# EAGLE board LogicEngineAVR (EAGLE 6.5.0)
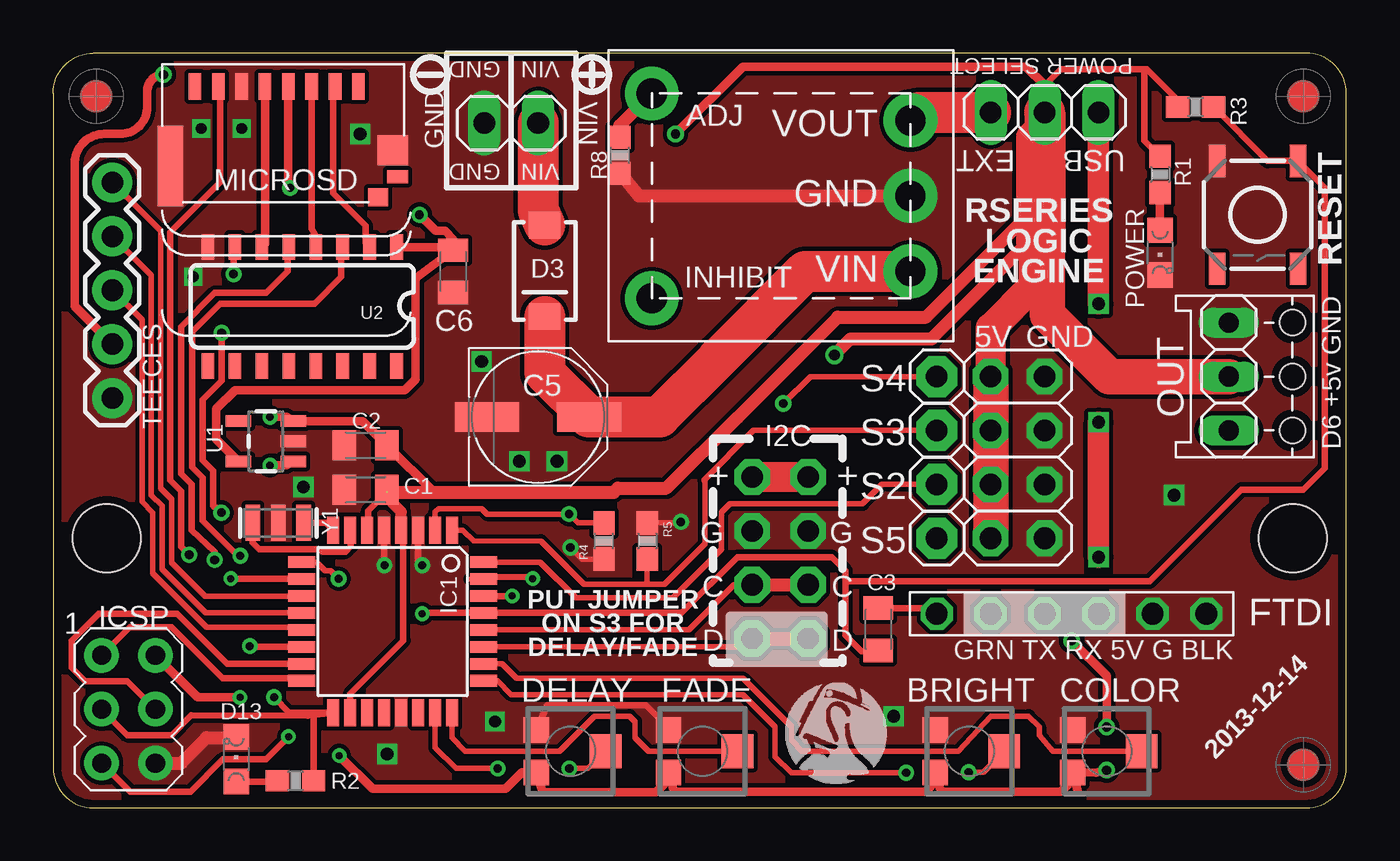
[diagram p0: board, top side]
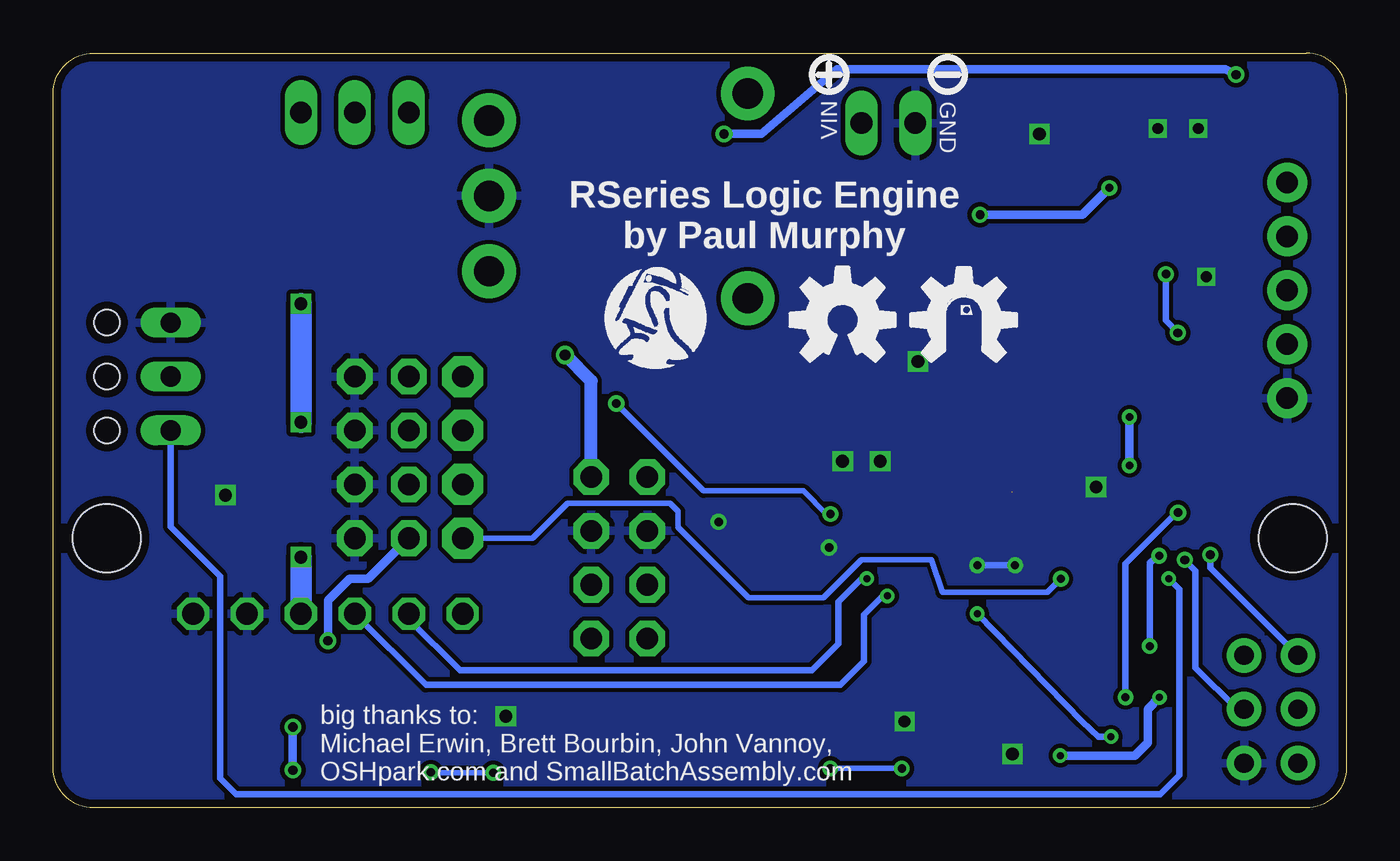
[diagram p1: board, bottom side, seen from below]

Size 60.96 x 35.56 mm. Coordinates in mm from the lower left corner, seen from the top.
Outline: 0,33.66 0,1.91 arc90 1.91,0 59.05,0 arc90 60.96,1.91 60.96,33.66 arc90 59.05,35.56 1.91,35.56 arc90 0,33.66
Copper layers (1*16): Top 0.0356mm / dielectric 1.5011mm / Bottom 0.0356mm
Design rules "LaenPCBOrder *": minimum track width 10mil, minimum drill 13mil, track to track 6mil, track to pad 6mil, pad to pad 6mil, via to via 12mil, smd to smd 6mil, copper to edge 15mil, drill to drill 6mil, minimum pad ring 7mil, minimum via ring 7mil, stop-mask expansion 4mil, vias tented up to drill 24mil, thermal gap 10mil
Net classes: 1 supply: width 0.305 mm, drill 0.152 mm, clearance 0.203 mm
Holes 3.2 mm at 58.42,12.7 2.54,12.7

## Footprints (pad centres in the part's own frame; a part is rotated, then mirrored left to right if it is on the bottom)
EVM3V = smd 1.2 x 1.2: 1 -1,-1.6; 3 1,-1.6 | smd 1.6 x 1.5: 2 0,1.65
C0805K = smd 1.1 x 1.4: 1 -1,0; 2 1,0
PANASONIC_D = smd 3 x 1.4: + 2.4,0; - -2.4,0
SMA-DIODE = smd 1.27 x 1.47: A -2.15,0; C 2.15,0
CHIPLED_0805 = smd 1.2 x 1.2: A 0,-1.05; C 0,1.05
1X02 = drill 1.016 long: 1 -1.27,0; 2 1.27,0
1X06-CLEAN = drill 1.016 octagon: 1 -6.35,0; 2 -3.81,0; 3 -1.27,0; 4 1.27,0; 5 3.81,0; 6 6.35,0
1X04-CB = drill 1.016 pad 1.676 octagon: 1 -3.81,0; 2 -1.27,0; 3 1.27,0; 4 3.81,0
TQFP32-08 = smd 1.27 x 0.559: 1 -4.293,2.8; 2 -4.293,2; 3 -4.293,1.2; 4 -4.293,0.4; 5 -4.293,-0.4; 6 -4.293,-1.2; 7 -4.293,-2; 8 -4.293,-2.8; 17 4.293,-2.8; 18 4.293,-2; 19 4.293,-1.2; 20 4.293,-0.4; 21 4.293,0.4; 22 4.293,1.2; 23 4.293,2; 24 4.293,2.8 | smd 0.559 x 1.27: 9 -2.8,-4.293; 10 -2,-4.293; 11 -1.2,-4.293; 12 -0.4,-4.293; 13 0.4,-4.293; 14 1.2,-4.293; 15 2,-4.293; 16 2.8,-4.293; 25 2.8,4.293; 26 2,4.293; 27 1.2,4.293; 28 0.4,4.293; 29 -0.4,4.293; 30 -1.2,4.293; 31 -2,4.293; 32 -2.8,4.293
AVRISP = drill 0.9 pad 1.626: 1 -1.27,2.54; 2 1.27,2.54; 3 -1.27,0; 4 1.27,0; 5 -1.27,-2.54; 6 1.27,-2.54
2X04 = drill 1.016 pad 1.676 octagon: 1 -3.81,-1.27; 2 -3.81,1.27; 3 -1.27,-1.27; 4 -1.27,1.27; 5 1.27,-1.27; 6 1.27,1.27; 7 3.81,-1.27; 8 3.81,1.27
MICROSD_SMALL = smd 0.6 x 1.25: 1 3.85,-0.05; 2 2.75,-0.05; 3 1.65,-0.05; 4 0.55,-0.05; 5 -0.55,-0.05; 6 -1.65,-0.05; 7 -2.75,-0.05; 8 -3.85,-0.05 | smd 0.95 x 0.85: CD1 4.775,-5.275 | smd 1 x 0.6: CD2 5.7,-4.3 | smd 1.2 x 3.8: MT1 -5,-3.8 | smd 1.45 x 1.4: MT2 5.475,-3.05
MDF7_1X03 = drill 0.95 long: 1 -2.54,0; 2 0,0; 3 2.54,0 | hole 1.2: 0,3; 2.54,3; -2.54,3
1X03 = drill 1.016 long: 1 -2.54,0; 2 0,0; 3 2.54,0
0603-RES = smd 1.1 x 1: 1 -0.85,0; 2 0.85,0
PTH08080W_TH = drill 1.422 pad 2.54: ADJ 6.096,-4.826; GND -6.096,0; INH 6.096,4.826; VIN -6.096,3.556; VOUT -6.096,-3.556
TACTILE_SWITCH_SMD = smd 1.524 x 0.762: 1 -2.54,1.905; 2 2.54,1.905; 3 -2.54,-1.905; 4 2.54,-1.905
1X01 = drill 1.016 pad 1.93 octagon: 1 0,0
1X05 = drill 1.016 pad 1.88: 1 0,0; 2 2.54,0; 3 5.08,0; 4 7.62,0; 5 10.16,0
SOT23-5 = smd 0.55 x 1.2: 1 -0.95,-1.3; 2 0,-1.3; 3 0.95,-1.3; 4 0.95,1.3; 5 -0.95,1.3
SO016 = smd 0.6 x 1.2: 1 -4.445,-2.8; 2 -3.175,-2.8; 3 -1.905,-2.8; 4 -0.635,-2.8; 5 0.635,-2.8; 6 1.905,-2.8; 7 3.175,-2.8; 8 4.445,-2.8; 9 4.445,2.8; 10 3.175,2.8; 11 1.905,2.8; 12 0.635,2.8; 13 -0.635,2.8; 14 -1.905,2.8; 15 -3.175,2.8; 16 -4.445,2.8
RESONATOR-SMD = smd 0.7 x 1.7: 1 -1.2,0; 2 0,0; 3 1.2,0

## Placement (x,y rotation side)
BRIGHT  10K  [EVM3V]  43.18,2.67 270 top
C1  0.1uF  [C0805K]  14.73,14.99 180 top
C2  0.1uF  [C0805K]  14.73,17.08 180 top
C3  0.1uF  [C0805K]  38.89,8.41 270 top
C5  100uF  [PANASONIC_D]  22.86,18.41 0 top
C6  10uF  [C0805K]  18.86,25.27 270 top
COLOR  10K  [EVM3V]  49.66,2.67 270 top
D3  BA340LA  [SMA-DIODE]  23.17,25.3 270 top
D13  RED  [CHIPLED_0805]  8.64,2.29 0 top
DELAY  10K  [EVM3V]  24.38,2.67 270 top
EXT_PWR  [1X02]  21.59,32.26 0 top
FADE  10K  [EVM3V]  30.61,2.67 270 top
FID4  [FIDUCIAL_G15]  2.03,33.53 0 top
FID5  [FIDUCIAL_G15]  58.93,33.53 0 top
FID6  [FIDUCIAL_G15]  58.93,2.03 0 top
FTDI  GRN TX RX 5V G BLK  [1X06-CLEAN]  48.01,9.14 180 top
I2C  [1X04-CB]  32.94,11.78 90 top
I2C1  [1X04-CB]  35.6,11.78 90 top
IC1  MEGA328P  [TQFP32-08]  16.01,8.78 270 top
ICSP  AVRISP-6  [AVRISP]  3.56,4.65 0 top
JP1  [2X04]  45.47,16.51 270 top
MICROSD  MICROSD  [MICROSD_SMALL]  10.54,34.04 0 top
OUT  [MDF7_1X03]  55.42,20.32 270 top
POWER  GREEN  [CHIPLED_0805]  52.17,26.16 180 top
PWR_SEL1  [1X03]  46.74,32.77 0 top
R1  1K  [0603-RES]  52.17,29.84 270 top
R2  1K  [0603-RES]  11.43,1.27 180 top
R3  10K  [0603-RES]  53.85,33.02 0 top
R4  10K  [0603-RES]  25.97,12.57 90 top
R5  10K  [0603-RES]  28,12.57 270 top
R8  348  [0603-RES]  26.72,30.75 90 top
REG  PTH08080W  [PTH08080W_TH]  34.32,28.83 180 top
RESET  RST  [TACTILE_SWITCH_SMD]  56.77,27.94 270 top
S2  [1X01]  41.66,15.24 0 top
S3  [1X01]  41.66,17.78 0 top
S4  [1X01]  41.66,20.32 0 top
S5  [1X01]  41.66,12.7 0 top
TEECES  G +5V D9 D8 D7  [1X05]  2.79,19.3 90 top
U1  LP2985  [SOT23-5]  10.03,17.27 90 top
U2  HEX_CONVERTER  [SO016]  11.75,23.62 180 top
U$1  [OSHW-LOGO-M]  23.75,22.99 0 bottom
U$3  [RSERIES-OSHW-LOGO-MEDIUM-BOTTOM]  18.03,21.97 0 bottom
U$4  [R2BUILDERS-LOGO]  35.05,20.57 0 bottom
U$5  [R2BUILDERS-LOGO]  34.42,1.02 0 top
Y1  16MHz  [RESONATOR-SMD]  10.62,13.42 0 top

## Library data of the parts
BRIGHT COLOR DELAY FADE MICROSD OUT REG U$3-U$5 = rseries
C1-C3 C5 C6 D13 ICSP JP1 POWER S2-S5 = adafruit
D3 = SparkFun-DiscreteSemi; PROD_ID: DIO-09886
EXT_PWR PWR_SEL1 = pinhead
FID4-FID6 = SmallBatchLibPre1
FTDI I2C I2C1 = carduino
IC1 = avr-7
R1-R5 R8 = SparkFun-Resistors
RESET = SparkFun-Electromechanical
TEECES = SparkFun-Connectors
U1 = SparkFun-PowerIC
U2 = SparkFun-DigitalIC
U$1 = SparkFun-Aesthetics
Y1 = SparkFun-FreqCtrl; PROD_ID: XTAL-08900

## Nets
+5V [supply]: BRIGHT.3 C1.1 C2.1 COLOR.3 DELAY.3 FADE.3 I2C1.4 I2C.4 IC1.4 IC1.6 IC1.18 ICSP.2 JP1.1 JP1.3 JP1.5 JP1.7 OUT.2 PWR_SEL1.2 R1.1 R3.1 TEECES.2 U1.1 U1.3
ANALOG0: DELAY.2 IC1.23
ANALOG1: FADE.2 IC1.24
ANALOG2: BRIGHT.2 IC1.25
ANALOG3: COLOR.2 IC1.26
ANALOG4: I2C1.1 I2C.1 IC1.27
ANALOG5: I2C1.2 I2C.2 IC1.28
AREF: IC1.20
DIGITAL2: IC1.32 S2.1
DIGITAL3: IC1.1 R5.2 S3.1
DIGITAL4: IC1.2 R4.2 S4.1
DIGITAL5: IC1.9 S5.1
DIGITAL6: IC1.10 OUT.3
DIGITAL7: IC1.11 TEECES.5
DIGITAL8: IC1.12 TEECES.4
DIGITAL9: IC1.13 TEECES.3
DIGITAL10: IC1.14 U2.3
GND [supply]: BRIGHT.1 C1.2 C2.2 C5.- C6.2 COLOR.1 D13.C DELAY.1 EXT_PWR.1 FADE.1 FTDI.1 FTDI.2 I2C1.3 I2C.3 IC1.3 IC1.5 IC1.21 ICSP.6 JP1.2 JP1.4 JP1.6 JP1.8 MICROSD.6 MICROSD.MT1 MICROSD.MT2 OUT.1 POWER.C R4.1 R5.1 R8.1 REG.GND RESET.3 TEECES.1 U1.2 U2.8 Y1.2
MISO: IC1.16 ICSP.1 MICROSD.7
MOSI: IC1.15 ICSP.4 U2.5
N$1: IC1.7 Y1.1
N$2: IC1.8 Y1.3
N$3: C5.+ D3.C REG.VIN
N$4: D13.A R2.2
N$5 [supply]: POWER.A R1.2
N$6: R8.2 REG.ADJ
N$11: D3.A EXT_PWR.2
N$16: MICROSD.3 U2.4
N$17: MICROSD.5 U2.6
N$18: MICROSD.2 U2.2
N$21: PWR_SEL1.1 REG.VOUT
RST: C3.2 IC1.29 ICSP.5 R3.2 RESET.1
RTS#: C3.1 FTDI.6
RXD: FTDI.4 IC1.30
SCK: IC1.17 ICSP.3 R2.1 U2.7
TXD: FTDI.5 IC1.31
USB_5V [supply]: FTDI.3 PWR_SEL1.3
VDD: C6.1 MICROSD.4 U1.5 U2.1

## Tracks (layer width: path | path; a pad name or v marks a point on that pad's centre or on a via)
+5V  (via drill 0.33, 0.36, 0.43, 0.51)  (1 unrouted)
  Top 0.305: 11.11,16.23 U1.1 | IC1.18 14.01,5.37 16.51,7.87 16.51,12.97 IC1.4 16.41,12.97 | IC1.6 14.73,13.07 | 14.86,13.07 14.86,14.01 15.75,14.89 C1.1 | 53,32.68 R3.1 53,33.36 51.56,34.8 51.44,34.8 | 51.44,34.8 47.5,34.8 46.74,34.04 | R1.1 51.44,31.43 51.44,34.8
  Top 0.406: COLOR.3 48.31,0.76 | COLOR.3 47.86,1.12 47.5,0.76 41.84,0.76 BRIGHT.3 41.38,1.02 41.12,0.76 29.26,0.76 FADE.3 28.81,1.12 28.42,0.74 23.06,0.74 DELAY.3 22.11,1.67 21.34,0.89 15.06,0.89 v13.49,2.46 | IC1.4 16.38,13.07 | ICSP.2 6.8,5.21 v8.81,5.21 | 14.73,13.07 14.86,13.07 | v10.22,18.41 11.01,18.41 U1.3 14.59,18.22 C2.1 17.95,14.86 18.03,14.86 | v10.22,16.13 11.01,16.13 U1.1 | 32.1,18.22 32.27,18.4 | COLOR.3 49.15,1.65 v49.66,1.78 | v49.66,3.81 49.66,6.22 v48.01,7.87 | TEECES.2 1.02,23.62 1.02,30.35 arc-90 2.41,31.75 3.17,31.75 arc90 4.45,33.02 4.45,33.78 arc-90 v5.21,34.54 | v29.34,31.75 32.51,34.92 45.85,34.92 46.74,34.04 PWR_SEL1.2
  Top 0.508: 16.41,12.97 16.41,13.95 16,14.35 16,14.76 C1.1
  Top 0.61: v36.83,21.34 37.59,22.1 41.4,22.1 45.72,26.42 45.72,27.69 | 45.72,27.69 45.72,31.75 PWR_SEL1.2 | 45.72,27.69 41.15,23.11 36.99,23.11 32.27,18.4 28.91,15.06 26.62,15.06 26.42,14.86 18.03,14.86 15.75,14.86 15.49,15.11
  Top 1.422: I2C.4 I2C1.4 | JP1.1 44.2,22.61 46.23,24.64 46.23,26.16 46.74,26.67
  Top 1.676: 46.74,26.67 46.86,26.67 46.86,23.24 49.78,20.32 OUT.2 | JP1.7 JP1.5 JP1.3 JP1.1
  Top 1.93: PWR_SEL1.2 46.74,26.67
  Bottom 0.406: v8.81,5.21 9.37,4.65 9.37,3.07 9.98,2.46 v13.49,2.46 | v10.22,18.41 v10.22,16.13 | v49.66,1.78 v49.66,3.81 | v48.01,7.87 48.01,9.78 46.99,10.79 46.1,10.79 JP1.7 | v5.21,34.54 5.71,34.8 24,34.8 27.56,31.75 v29.34,31.75
  Bottom 0.61: I2C1.4 35.6,20.1 v36.83,21.34
ANALOG0  (via drill 0.38)
  Top 0.254: 26.42,2.03 26.38,2.06 DELAY.2 25.22,1.85 v24.33,1.85 | IC1.23 18.01,2.82 19,1.85 v20.95,1.85
  Bottom 0.254: v20.95,1.85 v24.33,1.85
ANALOG1
  Top 0.254: IC1.24 18.81,3.29 19.43,2.67 23.88,2.67 25.53,4.32 27.18,4.32 27.43,4.06 27.43,3.3 28.07,2.67 FADE.2
ANALOG2  (via drill 0.38)
  Top 0.254: IC1.25 20.95,5.98 21.59,5.33 32.51,5.33 34.04,3.81 34.04,2.41 34.8,1.65 v40.21,1.65 | v43.16,1.68 43.84,1.68 BRIGHT.2
  Bottom 0.254: v40.21,1.65 43.13,1.65 v43.16,1.68
ANALOG3
  Top 0.254: IC1.26 21.16,6.78 21.84,6.1 32.51,6.1 34.8,3.81 34.8,3.17 35.31,2.67 42.67,2.67 44.2,4.32 45.97,4.32 46.48,3.81 46.48,3.43 47.12,2.67 COLOR.2
ANALOG4
  Top 0.254: IC1.27 32.55,7.58 I2C.1
  Top 0.61: I2C.1 I2C1.1
ANALOG5
  Top 0.254: I2C.2 32.1,10.51 29.97,8.38 IC1.28
  Top 0.61: I2C.2 I2C1.2
DIGITAL2
  Top 0.254: IC1.32 22.96,11.58 24.64,9.91 29.21,9.91 31.5,12.19 31.5,13.92 31.9,14.33 38.15,14.33 39.06,15.24 S2.1
DIGITAL3
  Top 0.254: S3.1 33.02,17.78 30.68,15.44 30.73,15.39 30.73,12.45 28.83,10.54 28,10.54 | IC1.1 19.3,13.07 19.81,12.57 23,12.56 25.02,10.54 28,10.54 | 28,10.54 R5.2
DIGITAL4  (via drill 0.38, 0.41)
  Top 0.254: IC1.2 18.01,13.94 18.16,14.1 20.19,14.1 20.45,13.84 v24.32,13.84 24.74,13.42 R4.2 | v34.42,19.05 35.69,20.32 S4.1
  Bottom 0.254: v34.42,19.05 30.3,14.94 25.6,14.94 24.51,13.84 v24.32,13.84
DIGITAL5  (via drill 0.38)
  Top 0.254: v13.46,10.79 13.08,11.18 12.83,11.18 12.42,11.58 IC1.9
  Bottom 0.254: S5.1 38.35,12.7 36.7,14.35 31.88,14.35 31.5,13.97 31.5,13.21 28.19,9.91 24.64,9.91 22.86,11.68 19.56,11.68 19.05,10.16 14.1,10.16 v13.46,10.79
DIGITAL6  (via drill 0.33)
  Top 0.305: IC1.10 11.7,10.79 v8.38,10.79
  Bottom 0.305: v8.38,10.79 7.87,10.29 7.87,1.52 8.76,0.64 52.32,0.64 53.09,1.4 53.09,10.92 55.42,13.25 OUT.3
DIGITAL7
  Top 0.254: TEECES.5 5.08,27.18 5.08,15.05 5.59,14.54 5.59,11.56 7.17,9.98 IC1.11
DIGITAL8
  Top 0.254: IC1.12 7.2,9.18 5.14,11.24 5.14,14.22 4.64,14.73 4.64,25.08 TEECES.4
DIGITAL9
  Top 0.254: IC1.13 11.59,8.51 7.24,8.51 4.7,11.05 4.7,13.91 4.19,14.41 4.19,22.99 TEECES.3
DIGITAL10  (via drill 0.38)
  Top 0.305: IC1.14 9.31,7.58 v9.27,7.62 | U2.3 13.59,26.36 13.59,25.02 12.32,23.75 7.87,23.75 6.55,22.43 6.55,16.05 7.05,15.56 7.05,13.53 8.7,11.87 v8.83,11.87
  Bottom 0.305: v9.27,7.62 9.27,11.56 v8.83,11.87
GND  (via drill 0.38, 0.41, 0.51, 0.56, 0.6)
  Top 0.254: R5.1 29.54,13.42 v29.59,13.47 | R4.1 24.93,11.72 v24.38,12.27
  Top 0.305: DELAY.1 23.29,4.83 27.94,4.83 28.65,4.12 FADE.1 | 17.27,13.01 IC1.3 17.21,11.62 v17.4,11.43 | IC1.5 15.61,11.44 v15.62,11.43
  Top 0.61: ICSP.6 6.04,2.11 7.24,3.3 8.6,3.3 D13.C | R8.1 27.6,28.83 REG.GND
  Bottom 0.305: v15.62,11.43 v17.4,11.43
  other vias: 52.83,14.73 15.75,2.54 20.83,4.06 39.62,4.32 6.99,32 14.48,31.75 11.8,15.11 21.97,16.33 8.89,32 6.6,25.02 20.19,21.03 23.75,16.33
  pour Bottom: -2.16,37.85 63.63,37.85 63.63,-2.29 -2.16,-2.29
  pour Top (no thermals): -0.51,36.83 62.36,36.83 62.36,-1.14 -0.51,-1.14
MISO  (via drill 0.41)
  Top 0.305: MICROSD.7 7.87,33.9 7.87,29.46 5.52,27.11 5.52,15.43 6.03,14.92 6.03,12.31 v6.41,11.93 | ICSP.1 3.61,8.51 5.59,8.51 7.99,6.11 10.03,6.1 11.6,6.1 IC1.16
  Bottom 0.305: ICSP.1 6.41,11.31 v6.41,11.93
MOSI  (via drill 0.41)
  Top 0.305: ICSP.4 3.5,5.97 1.52,5.97 0.89,6.6 0.89,7.87 2.16,9.14 5.84,9.14 8.21,6.78 IC1.15 | U2.5 11.05,26.36 11.05,25.27 10.03,24.26 7.62,24.26 6.03,22.67 6.03,15.75 6.54,15.24 6.54,13.08 7.62,12.06 v7.62,11.68
  Bottom 0.305: ICSP.4 5.15,4.65 7.11,6.6 7.11,11.18 v7.62,11.68
N$1
  Top 0.305: Y1.1 9.42,12.49 9.72,12.19 12.57,12.19 12.7,12.06 13.78,12.06 14.03,12.32 14.03,13.04 IC1.7
N$2
  Top 0.305: Y1.3 12.86,13.42 IC1.8
N$3
  Top 1.93: REG.VIN 35.45,25.27 31.36,21.18 | 31.34,21.2 31.36,21.18 | 31.36,21.18 28.59,18.41 C5.+ 23.17,20.5 D3.C
N$4
  Top 0.305: R2.2 10.55,1.24 D13.A
N$5
  Top 0.406: R1.2 POWER.A
N$6
  Top 0.61: REG.ADJ 26.72,32.16 R8.2
N$11
  Top 1.93: EXT_PWR.2 22.86,28.15 D3.A
N$16
  Top 0.305: MICROSD.3 12.19,27.28 12.38,26.96 U2.4
N$17
  Top 0.406: MICROSD.5 9.99,26.57 U2.6
N$18
  Top 0.305: MICROSD.2 13.21,33.9 13.21,28.96 14.73,27.43 14.73,26.61 U2.2
N$21
  Top 1.93: REG.VOUT 40.79,32.77 PWR_SEL1.1
RST  (via drill 0.33)
  Top 0.305: 37.34,10.67 37.34,8.13 38.1,7.37 38.85,7.37 C3.2 | 37.34,10.67 37.34,11.18 36.7,11.81 32.26,11.81 29.63,9.18 IC1.29 17.43,9.18 v17.4,9.14 | ICSP.5 3.63,0.76 6.48,0.76 8,2.29 10.03,2.29 v11.1,3.35 | R3.2 57.24,30.48 RESET.1 59.94,29.21 59.94,16 58.93,14.99 56.01,14.99 51.69,10.67 37.34,10.67
  Bottom 0.305: v11.1,3.35 11.68,3.35 12.45,4.06 v17.4,9.14
RTS#
  Top 0.305: C3.1 41.39,9.41 FTDI.6
RXD  (via drill 0.33)
  Top 0.305: IC1.30 21.38,9.98 v21.64,9.98
  Bottom 0.305: v21.64,9.98 21.84,9.98 22.73,9.09 22.73,6.91 23.85,5.79 43.38,5.79 FTDI.4
SCK  (via drill 0.38, 0.41)
  Top 0.305: ICSP.3 3.5,3.43 5.59,3.43 6.52,4.36 11.99,4.34 13.15,4.49 IC1.17 | IC1.17 12.28,4.4 R2.1 | v7.95,22.38 7.95,20.12 7.05,19.21 7.05,16.38 7.56,15.88 7.56,14.22 v7.94,13.91 | v8.51,25.15 8.51,26.36 U2.7 | IC1.17 11.13,4.49 v10.41,5.21
  Bottom 0.305: v7.95,22.38 8.51,22.96 v8.51,25.15 | v10.41,5.21 10.41,11.49 8.13,13.78 v7.94,13.91
TXD  (via drill 0.33)
  Top 0.305: IC1.31 19.7,10.78 19.79,10.87 22.39,10.88 v22.61,10.79
  Bottom 0.305: v22.61,10.79 22.86,10.79 23.95,9.7 23.95,7.72 25.2,6.48 41.78,6.48 44.2,8.89 FTDI.5
USB_5V  (via drill 0.6)
  Top 1.016: v49.28,11.81 v49.28,18.16 | v49.28,23.75 PWR_SEL1.3
  Bottom 1.016: FTDI.3 v49.28,11.81 | v49.28,18.16 v49.28,23.75
VDD  (via drill 0.38, 0.41)
  Top 0.406: MICROSD.4 11.09,29.3 v11.18,29.21 | U2.1 18.27,26.42 C6.1 | v17.27,27.94 18.03,27.18 18.48,27.18 18.86,26.8 C6.1 | U1.5 7.68,17.37 7.68,18.8 8.57,19.68 16.57,19.68 17.08,20.19 17.08,24 17.1,24.96 C6.1
  Bottom 0.406: v11.18,29.21 12.45,27.94 v17.27,27.94

## Text on the board
tPlace: GND | VIN | POWER SELECT | VIN | GND | EXT | USB | GND | VIN | RSERIES / LOGIC / ENGINE | 5V | GND | D6 +5v GND | + | + | G | G | C | C | PUT JUMPER / ON S3 FOR / DELAY/FADE | FTDI | D | D | 2013-12-14
bPlace: GND | VIN | RSeries Logic Engine / by Paul Murphy | big thanks to: / Michael Erwin, Brett Bourbin, John Vannoy, / OSHpark.com and SmallBatchAssembly.com